# EAGLE board mother_card_02 (EAGLE 8.3.2)
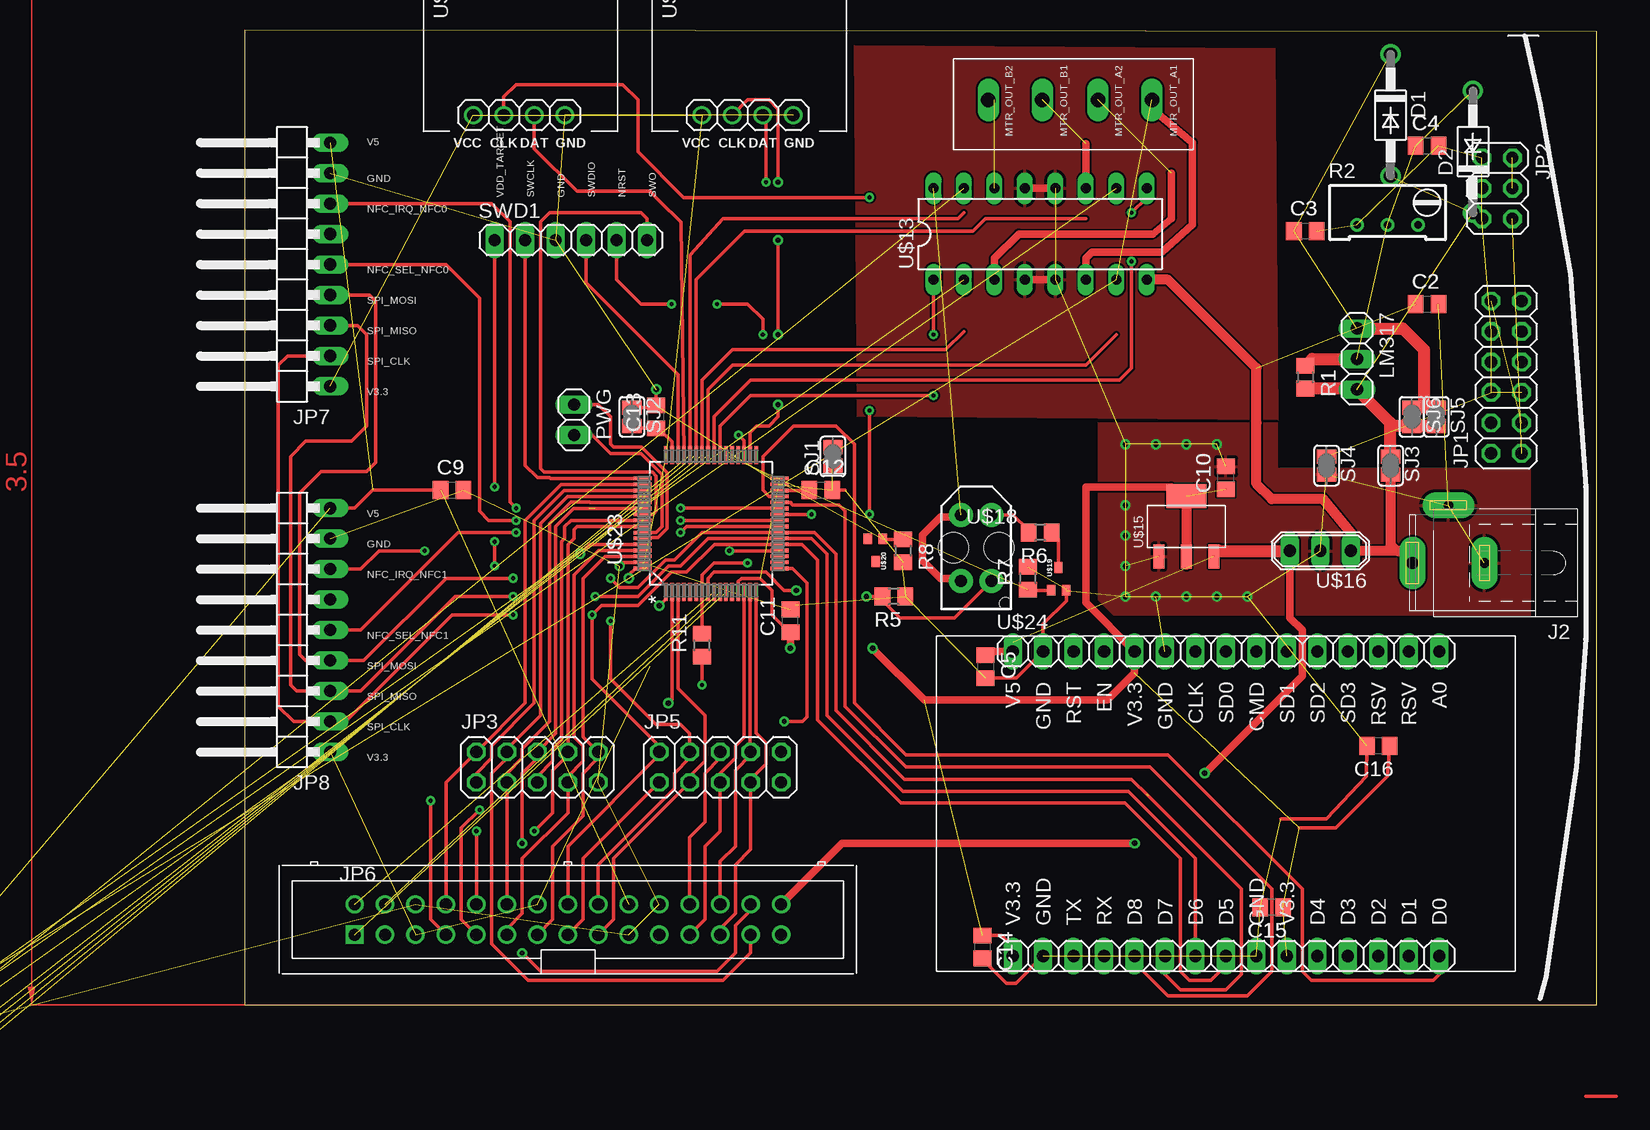
[diagram p0: board, top side]
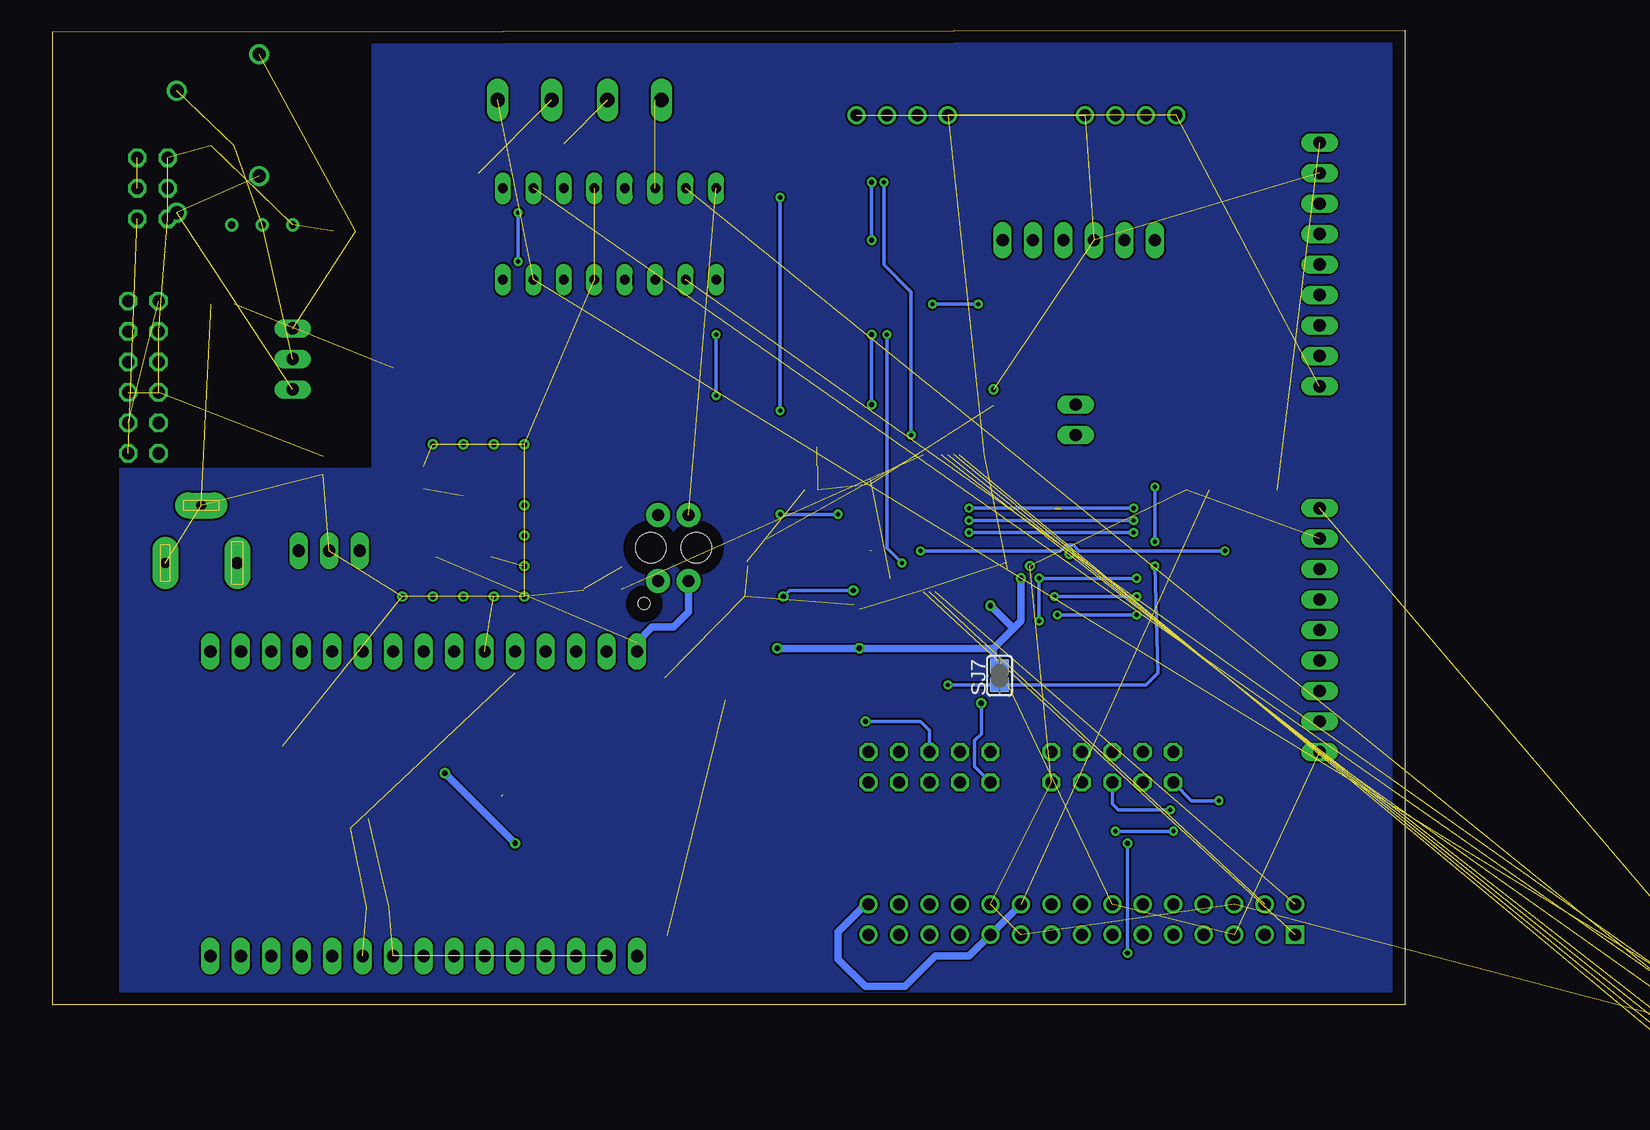
[diagram p1: board, bottom side, seen from below]

Size 112.7 x 81.27 mm. Coordinates in mm from the lower left corner, seen from the top.
Outline: 0,0 112.7,0 112.7,81.14 0,81.27 0,0
Copper layers (1*16): Top 0.035mm / dielectric 1.5mm / Bottom 0.035mm
Design rules "default": minimum track width 6mil, minimum drill 0.35mm, track to track 6mil, track to pad 6mil, pad to pad 6mil, via to via 6mil, smd to smd 6mil, copper to edge 40mil, drill to drill 6mil, minimum pad ring 10mil, minimum via ring 8mil, stop-mask expansion 4mil, vias tented up to drill 0mil, thermal gap 10mil

## Footprints (pad centres in the part's own frame; a part is rotated, then mirrored left to right if it is on the bottom)
C0805 = smd 1.3 x 1.5: 1 -0.95,0; 2 0.95,0
DO41-10 = drill 1.118: A 5.08,0; C -5.08,0
SPC4077 = drill 0.8 pad 2.184 long: 1 -3,0; 2 0,-4.8 | drill 1 pad 2.184 long: 3 3,0
2X06 = drill 1.016 octagon: 1 -6.35,-1.27; 2 -6.35,1.27; 3 -3.81,-1.27; 4 -3.81,1.27; 5 -1.27,-1.27; 6 -1.27,1.27; 7 1.27,-1.27; 8 1.27,1.27; 9 3.81,-1.27; 10 3.81,1.27; 11 6.35,-1.27; 12 6.35,1.27
2X03 = drill 1.016 octagon: 1 -2.54,-1.27; 2 -2.54,1.27; 3 0,-1.27; 4 0,1.27; 5 2.54,-1.27; 6 2.54,1.27
2X05 = drill 1.016 octagon: 1 -5.08,-1.27; 2 -5.08,1.27; 3 -2.54,-1.27; 4 -2.54,1.27; 5 0,-1.27; 6 0,1.27; 7 2.54,-1.27; 8 2.54,1.27; 9 5.08,-1.27; 10 5.08,1.27
2X15/SOCK = drill 1.016 square: 1 -17.78,-1.27 | drill 1.016: 2 -17.78,1.27; 3 -15.24,-1.27; 4 -15.24,1.27; 5 -12.7,-1.27; 6 -12.7,1.27; 7 -10.16,-1.27; 8 -10.16,1.27; 9 -7.62,-1.27; 10 -7.62,1.27; 11 -5.08,-1.27; 12 -5.08,1.27; 13 -2.54,-1.27; 14 -2.54,1.27; 15 0,-1.27; 16 0,1.27; 17 2.54,-1.27; 18 2.54,1.27; 19 5.08,-1.27; 20 5.08,1.27; 21 7.62,-1.27; 22 7.62,1.27; 23 10.16,-1.27; 24 10.16,1.27; 25 12.7,-1.27; 26 12.7,1.27; 27 15.24,-1.27; 28 15.24,1.27; 29 17.78,-1.27; 30 17.78,1.27
1X09/90 = drill 1.016 long: 1 -10.16,-3.81; 2 -7.62,-3.81; 3 -5.08,-3.81; 4 -2.54,-3.81; 5 0,-3.81; 6 2.54,-3.81; 7 5.08,-3.81; 8 7.62,-3.81; 9 10.16,-3.81
1X03 = drill 1.016 long: 1 -2.54,0; 2 0,0; 3 2.54,0
1X02 = drill 1.016 long: 1 -1.27,0; 2 1.27,0
R0805 = smd 1.3 x 1.5: 1 -0.95,0; 2 0.95,0
RTRIM64W = drill 0.61: 1 1.27,-2.54; 2 1.27,0; 3 1.27,2.54
SJ = smd 1.168 x 1.6: 1 -0.762,0; 2 0.762,0
1X06 = drill 1.016 long: 1 -6.35,0; 2 -3.81,0; 3 -1.27,0; 4 1.27,0; 5 3.81,0; 6 6.35,0
SOT355-1-L = smd 1.372 x 0.305: 1 -2.769,3.575; 2 -2.769,2.925; 3 -2.769,2.275; 4 -2.769,1.625; 5 -2.769,0.975; 6 -2.769,0.325; 7 -2.769,-0.325; 8 -2.769,-0.975; 9 -2.769,-1.625; 10 -2.769,-2.275; 11 -2.769,-2.925; 12 -2.769,-3.575; 13 2.769,-3.575; 14 2.769,-2.925; 15 2.769,-2.275; 16 2.769,-1.625; 17 2.769,-0.975; 18 2.769,-0.325; 19 2.769,0.325; 20 2.769,0.975; 21 2.769,1.625; 22 2.769,2.275; 23 2.769,2.925; 24 2.769,3.575
DIL16 = drill 0.813 long: 1 -8.89,-3.81; 2 -6.35,-3.81; 3 -3.81,-3.81; 4 -1.27,-3.81; 5 1.27,-3.81; 6 3.81,-3.81; 7 6.35,-3.81; 8 8.89,-3.81; 9 8.89,3.81; 10 6.35,3.81; 11 3.81,3.81; 12 1.27,3.81; 13 -1.27,3.81; 14 -3.81,3.81; 15 -6.35,3.81; 16 -8.89,3.81
1X4/BLOCK = drill 1.2 long: P$1 0,0; P$2 4.5,0; P$3 9.15,0; P$4 13.65,0
AP2114H = smd 0.9 x 2: GND -2.3,-2.52; VIN 2.3,-2.52; VOUT 0,-2.52 | smd 3.3 x 2: VOUTB 0,2.53
SIP3 = drill 1.016 long: GND 0,0; VI -2.54,0; VO 2.54,0
TCRT5000 = drill 1 pad 2: A 2.75,1.27; CATH 2.75,-1.27; COLL -2.75,1.27; E -2.75,-1.27 | hole 2.5: 0,1.9; 0,-1.9 | hole 1: -4.65,-2.45
SOT323 = smd 0.7 x 0.9: D 0,0.9; G -0.6,-1; S 0.65,-1
HX711 = drill 1.016: CLK -2.54,1.52; DAT -2.54,4.06; GND -2.54,6.6; VCC -2.54,-1.02
QFP50P1200X1200X160-64N = smd 1.5 x 0.3: 1 -5.715,3.759; 2 -5.715,3.251; 3 -5.715,2.743; 4 -5.715,2.261; 5 -5.715,1.753; 6 -5.715,1.245; 7 -5.715,0.762; 8 -5.715,0.254; 9 -5.715,-0.254; 10 -5.715,-0.762; 11 -5.715,-1.245; 12 -5.715,-1.753; 13 -5.715,-2.261; 14 -5.715,-2.743; 15 -5.715,-3.251; 16 -5.715,-3.759; 33 5.715,-3.759; 34 5.715,-3.251; 35 5.715,-2.743; 36 5.715,-2.261; 37 5.715,-1.753; 38 5.715,-1.245; 39 5.715,-0.762; 40 5.715,-0.254; 41 5.715,0.254; 42 5.715,0.762; 43 5.715,1.245; 44 5.715,1.753; 45 5.715,2.261; 46 5.715,2.743; 47 5.715,3.251; 48 5.715,3.759 | smd 0.3 x 1.5: 17 -3.759,-5.715; 18 -3.251,-5.715; 19 -2.743,-5.715; 20 -2.261,-5.715; 21 -1.753,-5.715; 22 -1.245,-5.715; 23 -0.762,-5.715; 24 -0.254,-5.715; 25 0.254,-5.715; 26 0.762,-5.715; 27 1.245,-5.715; 28 1.753,-5.715; 29 2.261,-5.715; 30 2.743,-5.715; 31 3.251,-5.715; 32 3.759,-5.715; 49 3.759,5.715; 50 3.251,5.715; 51 2.743,5.715; 52 2.261,5.715; 53 1.753,5.715; 54 1.245,5.715; 55 0.762,5.715; 56 0.254,5.715; 57 -0.254,5.715; 58 -0.762,5.715; 59 -1.245,5.715; 60 -1.753,5.715; 61 -2.261,5.715; 62 -2.743,5.715; 63 -3.251,5.715; 64 -3.759,5.715
ESP8266 = drill 1.016 long: A0 19.05,0; CLK -1.27,0; CMD 3.81,0; D0 19.05,-25.4; D1 16.51,-25.4; D2 13.97,-25.4; D3 11.43,-25.4; D4 8.89,-25.4; D5 1.27,-25.4; D6 -1.27,-25.4; D7 -3.81,-25.4; D8 -6.35,-25.4; EN -8.89,0; GND -13.97,-25.4; GND@1 3.81,-25.4; GND@2 -3.81,0; GND@3 -13.97,0; RST -11.43,0; RSV 16.51,0; RSV@1 13.97,0; RX -8.89,-25.4; SD0 1.27,0; SD1 6.35,0; SD2 8.89,0; SD3 11.43,0; TX -11.43,-25.4; V3.3 -16.51,-25.4; V3.3@1 6.35,-25.4; V3.3@2 -6.35,0; V5 -16.51,0

## Placement (x,y rotation side)
C2  1u  [C0805]  98.55,58.42 0 top
C3  0.1u  [C0805]  88.39,64.52 0 top
C4  1u  [C0805]  98.55,71.63 0 top
C5  [C0805]  61.72,28.19 270 top
C9  4.7u  [C0805]  17.27,42.93 0 top
C10  4.7u  [C0805]  81.79,43.94 90 top
C11  [C0805]  45.47,32 90 top
C12  [C0805]  48.01,42.93 0 top
C13  [C0805]  34.29,49.02 90 top
C14  [C0805]  61.47,4.83 270 top
C15  [C0805]  85.6,8.13 180 top
C16  [C0805]  94.49,21.59 180 top
D1  1N4004  [DO41-10]  95.5,74.17 270 top
D2  1N4004  [DO41-10]  102.36,71.12 90 top
J2  [SPC4077]  100.33,36.83 180 top
JP1  [2X06]  105.16,52.32 90 top
JP2  [2X03]  104.39,68.07 270 top
JP3  [2X05]  24.38,19.81 0 top
JP5  [2X05]  39.62,19.81 0 top
JP6  [2X15/SOCK]  26.92,7.11 0 top
JP7  [1X09/90]  3.3,61.72 90 top
JP8  [1X09/90]  3.3,31.24 90 top
LM317  [1X03]  92.71,53.85 270 top
PWG  [1X02]  27.43,48.77 270 top
R1  [R0805]  88.39,52.32 270 top
R2  [RTRIM64W]  95.25,66.29 270 top
R5  [R0805]  54.1,34.04 180 top
R6  [R0805]  66.29,39.37 180 top
R7  [R0805]  65.28,35.56 90 top
R8  [R0805]  54.86,37.85 270 top
R11  [R0805]  38.1,29.97 90 top
SJ1  [SJ]  49.02,45.72 90 top
SJ2  [SJ]  32.26,49.02 270 top
SJ3  [SJ]  95.5,44.96 270 top
SJ4  [SJ]  90.17,44.96 270 top
SJ5  [SJ]  99.31,49.02 270 top
SJ6  [SJ]  97.28,49.02 270 top
SJ7  [SJ]  33.78,27.43 90 bottom
SWD1  [1X06]  27.18,63.75 0 top
U1  74LVC4245APWSOT355-1-L  [SOT355-1-L]  -25.4,-3.56 0 top  (outside the outline)
U$13  L293  [DIL16]  66.29,64.26 0 top
U$14  TERMINAL_BLOCK  [1X4/BLOCK]  61.98,75.44 0 top
U$15  AP2114H  [AP2114H]  78.49,39.88 0 top
U$16  OKI-78SR-W36  [SIP3]  89.66,37.85 180 top
U$18  TCRT5000  [TCRT5000]  60.96,38.1 90 top
U$19  DMG1012  [SOT323]  67.82,35.56 0 top
U$20  DMG1012  [SOT323]  52.58,37.85 180 top
U$21  HX711  [HX711]  20.07,71.63 270 top
U$22  HX711  [HX711]  39.12,71.63 270 top
U$23  STM32F410RBT6  [QFP50P1200X1200X160-64N]  38.86,40.13 90 top
U$24  ESP8266  [ESP8266]  80.52,29.46 0 top

## Library data of the parts
C2-C5 C9-C16 R1 R5-R8 U$13-U$16 U$18-U$24 = seniorDesign
D1 D2 = diode
J2 = con-jack; OC_FARNELL: unknown; OC_NEWARK: unknown
JP1-JP3 JP5 JP7 JP8 LM317 PWG SWD1 = pinhead
JP6 = csomers
R2 = rcl
R11 = resistor
SJ1-SJ7 = jumper
U1 = seniorDesign; MANUFACTURER_PART_NUMBER: 74LVC4245APW; VENDOR: NXP

## Nets
BOOT: U$23.60
F_A0: JP3.8 JP6.10 U$23.57
F_BUTTON: U$23.33
F_CLK: JP3.3 JP6.12 U$23.53
F_CS_DP: JP5.3 JP6.17 U$23.3
F_NCS1: JP3.5 JP6.9 U$23.56
F_NCS2: JP3.7 JP6.11 U$23.61
F_NRD: JP3.1 JP6.7 U$23.51
F_NRST: JP3.2 JP6.8 U$23.50
F_NWR: JP3.10 JP6.13 U$23.62
F_PWR_LED_B: JP3.4 JP6.27 U$23.52
F_PWR_LED_G: JP5.7 JP6.25 U$23.16
F_PWR_LED_R: JP5.5 JP6.23 U$23.14
F_RCLK: JP5.1 JP6.15 U$23.2
F_ROTA: JP6.2 U$23.9
F_ROTB: JP6.4 U$23.10
F_ROTSW: JP6.1 U$23.11
F_SEL: JP6.3
F_WIFI_LED_B: JP5.6 JP6.24 U$23.17
F_WIFI_LED_G: JP5.8 JP6.26 U$23.15
F_WIFI_LED_R: JP3.6 JP6.28 U$23.54
GND: C2.2 C5.2 C9.2 C10.2 C11.2 C12.2 C13.2 C14.2 C15.2 C16.2 J2.1 J2.2 JP3.9 JP6.6 JP6.19 JP6.22 JP7.8 JP8.8 R5.1 R7.2 R8.2 SJ1.1 SJ1.2 SJ2.1 SJ4.2 SWD1.3 U1.2 U1.11 U1.12 U1.13 U1.22 U$13.4 U$13.5 U$13.12 U$13.13 U$15.GND U$16.GND U$19.S U$21.GND U$22.GND U$23.12 U$23.31 U$23.63 U$24.GND U$24.GND@1 U$24.GND@2 U$24.GND@3
INT: JP1.9
IR_DRAIN1: U$20.D
IR_SENS_ANLG_IN: R5.2 U$18.E U$23.8
IR_SOURCE1: U$20.S
IR_START0: R7.1 U$19.G U$23.38
IR_START1: R8.1 U$20.G U$23.37
MTR_A1: U1.21 U$23.41
MTR_A2: U1.20 U$23.42
MTR_B1: U1.19 U$23.43
MTR_B2: U1.18 U$23.44
MTR_EN1,2: U$13.1 U$23.39
MTR_EN3,4: U$13.9 U$23.40
MTR_IN_A1: U1.3 U$13.7 U$14.P$4
MTR_IN_A2: U1.4 U$13.2
MTR_IN_B1: U1.5 U$13.10
MTR_IN_B2: U1.6 U$13.15
MTR_OUT_A1: U$13.6
MTR_OUT_A2: U$13.3 U$14.P$3
MTR_OUT_B1: U$13.11 U$14.P$2
MTR_OUT_B2: U$13.14 U$14.P$1
N$1: C12.1 U$23.30
N$5: R6.2 U$18.CATH
N$10: R6.1 U$19.D
N$17: JP5.9
N$18: JP5.10
NFC_IRQ_NFC0: JP7.7 U$23.27
NFC_IRQ_NFC1: JP8.7 U$23.20
NFC_SEL_NFC0: JP7.5 U$23.25
NFC_SEL_NFC1: JP8.5 U$23.24
NRST: R11.2 SWD1.5 U$23.7
PRG_RX<: PWG.1 U$23.59
PRG_TX>: PWG.2 U$23.58
SCL: JP1.8
SDA: JP1.7
SPI2_CLK: U$22.CLK U$23.34
SPI2_MISO: U$22.DAT U$23.35
SPI5_CLK: U$21.CLK U$23.26
SPI5_MISO: U$21.DAT U$23.45
SPI_CLK: JP5.2 JP6.16 JP7.2 JP8.2 U$23.21 U$24.D5
SPI_MISO: JP7.3 JP8.3 U$23.22 U$24.D6
SPI_MOSI: JP5.4 JP6.18 JP7.4 JP8.4 U$23.23 U$24.D7
SWCLK: SWD1.2 U$23.49
SWDIO: SWD1.4 U$23.46
SWO: SWD1.6 U$23.55
USB12V: D1.A D2.C LM317.3 R1.2 SJ3.1 SJ5.2 SJ6.2
USBGND: C3.2 C4.2 JP1.5 JP1.6 JP1.10 JP2.1 JP2.3 JP2.5 R2.1 SJ4.1
USBVBUS: C3.1 D1.C LM317.1 SJ5.1 SJ6.1
V3.3: C10.1 C11.1 C14.1 C15.1 C16.1 JP6.5 JP6.14 JP7.1 JP8.1 SJ7.2 U1.23 U1.24 U$15.VOUT U$15.VOUTB U$21.VCC U$22.VCC U$23.1 U$23.13 U$23.32 U$23.48 U$23.64 U$24.V3.3 U$24.V3.3@1 U$24.V3.3@2
V5: C5.1 C9.1 JP6.20 JP6.21 JP6.30 JP7.9 JP8.9 U1.1 U$13.16 U$15.VIN U$16.VO U$18.A U$18.COLL U$24.V5
V12: C2.1 J2.3 SJ3.2 U$13.8 U$16.VI
V_PULLUP: JP1.2
VADJ: C4.1 D2.A LM317.2 R1.1 R2.2
VBUS: JP2.2 JP2.4
VBUS_A: JP1.4
VCAP_2: C13.1 SJ2.2 U$23.47
VCONN: JP1.1 JP2.6
VDD: JP1.3 JP1.12
VDD_TARGET: R11.1 SJ7.1 SWD1.1
VPU: JP1.11
WIFI_CS: U$23.28 U$24.D8
WIFI_GPIO: U$24.D1
WIFI_IRQ: U$23.29 U$24.D0

## Tracks (layer width: path | path; a pad name or v marks a point on that pad's centre or on a via)
BOOT  (via drill 0.45)
  Top 0.305: U$23.60 28.73,38.38 v27.94,37.59
F_A0  (via drill 0.35)
  Top 0.305: v24.13,14.48 25.65,16 25.65,19.56 26.92,20.83 JP3.8 26.92,38.35 27.43,38.86 27.43,39.62 27.69,39.88 U$23.57 | v19.3,14.48 JP6.10
  Bottom 0.305: v24.13,14.48 v19.3,14.48
F_CLK
  Top 0.305: U$23.53 28.76,41.89 28.73,41.91 27.18,41.91 25.4,40.13 25.4,23.62 23.11,21.34 23.11,20.57 21.84,19.3 JP3.3 JP6.12
F_CS_DP
  Top 0.305: JP6.17 30.73,7.11 30.73,12.19 JP5.3 37.08,19.05 38.35,20.32 38.35,24.13 36.12,26.36 U$23.3
F_NCS1  (via drill 0.35)
  Top 0.305: JP6.9 18.03,7.11 18.03,14.73 v19.56,16.26 | U$23.56 27.18,40.39 26.67,39.88 26.67,38.86 26.42,38.61 26.42,22.1 25.65,21.34 25.65,20.32 24.38,19.05 JP3.5
  Bottom 0.305: JP3.5 24.38,16.76 23.88,16.26 v19.56,16.26
F_NCS2
  Top 0.305: U$23.61 29.49,37.87 27.43,35.81 27.43,22.35 28.19,21.59 28.19,20.32 26.92,19.05 JP3.7 26.92,16 23.11,12.19 23.11,7.62 21.84,6.35 JP6.11
F_NRD  (via drill 0.35)
  Top 0.305: U$23.51 26.62,42.88 24.13,40.39 24.13,25.15 20.57,21.59 20.57,20.57 19.3,19.3 JP3.1 | v15.49,17.02 15.49,7.11 JP6.7
  Bottom 0.305: JP3.1 17.78,17.02 v15.49,17.02
F_NRST
  Top 0.305: U$23.50 26.36,43.38 23.37,40.39 23.37,25.65 23.37,25.62 23.37,25.15 JP3.2 16.76,18.54 JP6.8
F_NWR
  Top 0.305: U$23.62 30.02,37.39 28.19,35.56 28.19,22.35 29.34,21.21 | 29.34,21.21 JP3.10 | JP6.13 25.65,7.11 25.65,13.21 28.19,15.75 28.19,19.3 29.34,20.45 29.34,21.21
F_PWR_LED_B
  Top 0.305: JP6.27 42.16,4.32 39.88,2.03 23.62,2.03 20.57,5.08 20.57,19.3 21.84,20.57 JP3.4 21.84,21.34 24.64,24.13 24.64,40.13 26.9,42.39 U$23.52
F_PWR_LED_G
  Top 0.305: JP6.25 39.62,6.35 40.89,7.62 40.89,11.68 42.16,12.95 JP5.7 42.16,18.8 43.43,20.07 43.43,21.84 42.62,22.66 U$23.16
F_PWR_LED_R
  Top 0.305: U$23.14 41.61,22.3 40.89,21.59 40.89,20.57 39.62,19.3 JP5.5 39.62,14.48 38.35,13.21 38.35,7.11 JP6.23
F_RCLK  (via drill 0.45)
  Top 0.305: JP6.15 28.19,7.11 28.19,12.19 JP5.1 | v35.31,25.15 35.61,25.45 U$23.2
  Bottom 0.305: v35.31,25.15 35.31,22.59 35.86,22.03 35.86,19.86 JP5.1
F_ROTA  (1 unrouted)
F_ROTB  (1 unrouted)
F_ROTSW  (1 unrouted)
F_WIFI_LED_B  (via drill 0.4)
  Top 0.305: JP6.24 37.08,13.97 38.35,15.24 38.35,19.3 39.62,20.57 JP5.6 | v44.96,23.62 46.23,23.62 46.48,23.64 46.86,24.02 46.86,35.18 45.67,36.37 U$23.17
  Bottom 0.305: JP5.6 39.62,22.86 40.39,23.62 v44.96,23.62
F_WIFI_LED_G
  Top 0.305: JP6.26 39.62,11.94 40.89,13.21 40.89,19.56 42.16,20.83 JP5.8 42.11,21.13 U$23.15
F_WIFI_LED_R  (via drill 0.4)  (1 unrouted)
  Top 0.305: 28.68,41.38 U$23.54 | JP6.28 42.16,7.87 40.89,6.6 40.89,4.32 39.37,2.79 24.64,2.79 v23.11,4.32 | 29.21,41.38 27.41,41.38 25.91,39.88 25.91,22.61 JP3.6 24.38,20.57 23.11,19.3 v23.11,13.46
  Bottom 0.305: v23.11,4.32 v23.11,13.46
GND  (via drill 0.45)  (52 unrouted)
  Top 0.305: 68.47,34.69 U$19.S 68.47,33.67 66.55,31.75 U$24.GND@3 64.33,27.24 C5.2 | 48.96,44.89 SJ1.1 | 50.04,42.93 C12.2 | C14.2 61.47,3.81 63.5,1.78 64.26,1.78 U$24.GND | 45.91,33.34 C11.2 | SJ2.1 34.1,49.78 C13.2 v34.29,51.31 | 86.36,15.49 90.17,15.49 93.47,19.05 C16.2 | U$23.63 31.55,36.88 v31.24,36.58 | 55.05,36.71 R8.2
  Top 0.406: R8.2 54.8,36.58
  Top 0.61: U$13.4 U$13.5 | U$13.13 U$13.12
  other vias: 81.03,46.74 78.49,46.74 75.95,46.74 73.41,46.74 73.41,41.66 73.41,39.12 73.41,36.58 73.41,34.04 75.95,34.04 78.49,34.04 81.03,34.04 83.57,34.04
  pour Top: 71.12,48.51 71.12,33.78 72.39,32.51 107.19,32.51 107.19,44.7 86.11,44.7 86.11,48.51
  pour Top: 50.8,80.01 85.85,79.76 86.11,48.77 51.05,49.02
IR_SENS_ANLG_IN  (via drill 0.45)
  Top 0.305: U$18.E 59.14,32.26 54.61,32.26 53.15,33.72 R5.2 v51.82,34.04 | U$23.8 38.61,35.56 39.12,36.07 43.43,36.07 44.96,34.54 v45.97,34.54
  Bottom 0.305: v45.97,34.54 51.31,34.54 v51.82,34.04
IR_START0  (1 unrouted)
  Top 0.305: U$19.G 65.33,34.56 R7.1
IR_START1  (1 unrouted)
  Top 0.305: R8.1 53.23,38.8 U$20.G
  Top 0.406: 55.07,38.85 R8.1
MTR_A1  (1 unrouted)
  Top 0.305: 72.64,55.88 70.1,53.34 40.64,53.34 38.61,51.31 U$23.41
MTR_A2  (1 unrouted)
  Top 0.305: U$23.42 38.1,52.07 40.64,54.61 58.42,54.61 59.94,56.13
MTR_B1  (1 unrouted)
  Top 0.305: U$23.43 37.59,45.87 37.59,60.45 41.66,64.52 60.71,64.52 61.72,65.53 70.1,65.53
MTR_B2  (1 unrouted)
  Top 0.305: 59.94,66.04 59.44,65.53 39.88,65.53 37.11,62.51 U$23.44
MTR_EN1,2  (via drill 0.35)
  Top 0.305: U$23.39 39.62,48.26 42.16,50.8 v57.4,50.8 | U$13.1 v57.4,55.88
  Bottom 0.305: v57.4,55.88 v57.4,50.8
MTR_EN3,4  (via drill 0.35)
  Top 0.305: U$23.40 39.12,49.02 42.16,52.07 72.9,52.07 73.91,53.09 v73.91,61.98 | v73.91,66.04 75.18,67.31 U$13.9
  Bottom 0.305: v73.91,61.98 v73.91,66.04
MTR_IN_A1  (2 unrouted)
MTR_IN_A2  (1 unrouted)
MTR_IN_B1  (1 unrouted)
MTR_IN_B2  (1 unrouted)
MTR_OUT_A1
  Top 0.61: U$13.6 70.1,62.23 70.61,62.74 76.45,62.74 78.99,65.02 78.99,71.88 75.88,74.49
MTR_OUT_A2  (1 unrouted)
  Top 0.305: 62.48,60.96 U$13.3
  Top 0.61: U$13.3 62.48,62.23 64.52,64.26 75.69,64.26 77.22,65.53 77.22,69.35
MTR_OUT_B1  (1 unrouted)
  Top 0.61: 70.1,71.81 U$13.11
MTR_OUT_B2  (1 unrouted)
  Top 0.61: 62.48,75.44 U$14.P$1
N$1
  Top 0.305: U$23.30 47,42.88 C12.1
N$2
  pour Bottom: 0.51,80.77 86.11,80.77 86.11,44.7 107.19,44.7 107.19,0.51 1.02,0.51 0.51,0
N$3
  Top 0.305: 111.76,-7.62 114.3,-7.62
N$5
  Top 0.305: U$18.CATH 64.04,40.85 65.28,39.61 65.28,39.3 R6.2
N$10
  Top 0.305: U$19.D 67.82,38.8 R6.1
NFC_IRQ_NFC0  (via drill 0.35)
  Top 0.305: v36.32,41.4 44.55,41.4 U$23.27 | v22.61,41.4 22.1,41.91 22.1,65.28 20.57,66.8 JP7.7
  Bottom 0.305: v22.61,41.4 v36.32,41.4
NFC_IRQ_NFC1  (via drill 0.35)  (1 unrouted)
  Top 0.305: JP8.7 9.65,36.32 11.18,37.85 v14.99,37.85 | v40.39,37.85 44.45,37.85
  Bottom 0.305: v14.99,37.85 27.16,37.85 27.64,38.33 28.24,38.33 28.72,37.85 v40.39,37.85
NFC_SEL_NFC0  (via drill 0.35)
  Top 0.305: JP7.5 16.76,61.72 19.56,58.93 19.56,41.15 20.32,40.39 v22.61,40.39 | v36.32,40.39 U$23.25
  Bottom 0.305: v36.32,40.39 v22.61,40.39
NFC_SEL_NFC1  (via drill 0.35)
  Top 0.305: U$23.24 36.83,39.88 v36.32,39.37 | v22.61,39.37 17.78,39.37 9.65,31.24 JP8.5
  Bottom 0.305: v36.32,39.37 v22.61,39.37
NRST  (via drill 0.35)
  Top 0.305: R11.2 U$23.7 38.1,35.81 39.12,36.83 v41.91,36.83 | SWD1.5 30.99,60.45 33.02,58.42 v35.56,58.42 | v39.37,58.42 41.91,58.42 43.18,57.15 v43.18,55.88
  Bottom 0.305: v35.56,58.42 v39.37,58.42 | v43.18,55.88 43.18,38.1 v41.91,36.83
PRG_RX<
  Top 0.254: 33.2,38.94 U$23.59 | 33.43,46.13 33.27,46.3
  Top 0.305: 33.2,38.94 34.44,38.94 35.2,39.71 35.2,44.36 33.43,46.13 33.09,46.48 30.73,46.48 30.48,46.74 30.48,49.02 29.46,50.04 PWG.1
PRG_TX>
  Top 0.305: U$23.58 34.29,39.37 34.8,39.88 34.8,44.2 33.02,45.97 30.48,45.97 28.96,47.5 PWG.2
SPI2_CLK  (via drill 0.4)
  Top 0.305: U$23.34 42.11,47.7 42.67,48.26 43.69,48.26 44.45,49.02 v44.45,50.04 | v44.45,55.88 v44.45,63.75 | v44.45,68.58 44.45,74.68 43.69,75.44 41.91,75.44 U$22.CLK
  Bottom 0.305: v44.45,50.04 v44.45,55.88 | v44.45,63.75 v44.45,68.58
SPI2_MISO  (via drill 0.35)
  Top 0.305: U$23.35 41.61,47.04 v41.15,47.5 | U$22.DAT 43.43,73.92 v43.43,68.58
  Bottom 0.305: v41.15,47.5 41.15,59.44 43.43,61.72 v43.43,68.58
SPI5_CLK  (via drill 0.35)
  Top 0.305: U$21.CLK 21.59,75.69 22.61,76.71 31.5,76.71 32.77,75.44 32.77,71.12 36.58,67.31 v52.07,67.31 | v52.07,49.53 v52.07,40.89 | v47.24,40.89 U$23.26
  Bottom 0.305: v52.07,67.31 v52.07,49.53 | v52.07,40.89 v47.24,40.89
SPI5_MISO
  Top 0.305: U$23.45 36.35,65.25 34.54,67.06 33.78,67.82 27.69,67.82 24.13,71.38 U$21.DAT
SPI_CLK  (via drill 0.35)
  Top 0.305: v22.35,32.51 17.27,32.51 8.38,23.62 JP8.2 4.06,23.62 2.79,24.89 2.79,53.34 3.56,54.1 JP7.2 | JP6.16 26.92,13.21 34.54,20.83 JP5.2 34.54,21.59 28.96,27.18 v28.96,32.51 29.72,33.27 32.77,33.27 35.56,36.07 36.83,36.07 39.14,38.38 U$23.21 46.46,38.38 47.75,37.08 47.75,23.74 54.67,16.82 73.36,16.82 77.98,12.19 77.98,2.79 78.74,2.03 80.52,2.03 81.79,3.3 U$24.D5
  Bottom 0.305: v22.35,32.51 v28.96,32.51
SPI_MISO  (via drill 0.35)
  Top 0.305: U$24.D6 79.25,12.19 73.66,17.78 54.86,17.78 48.51,24.13 48.51,37.59 47.24,38.86 44.6,38.86 U$23.22 41.29,38.86 38.61,38.86 36.32,36.58 35.31,36.58 32.77,34.04 v29.21,34.04 | v22.35,34.04 17.53,34.04 9.65,26.16 JP8.3 4.32,26.16 3.81,26.67 3.81,45.72 5.08,46.99 8.89,46.99 10.16,48.26 10.16,55.88 9.4,56.64 JP7.3
  Bottom 0.305: v22.35,34.04 v29.21,34.04
SPI_MOSI  (via drill 0.35)  (1 unrouted)
  Top 0.305: JP6.18 29.46,11.68 35.81,18.03 35.81,19.3 37.08,20.57 JP5.4 37.08,22.61 36.32,23.37 34.29,23.37 30.48,27.18 v30.48,32 | v22.35,35.56 16.76,35.56 9.91,28.7 JP8.4 5.08,28.7 4.57,29.21 4.57,42.67 6.35,44.45 10.16,44.45 10.92,45.21 10.92,58.67 10.41,59.18 JP7.4 | U$24.D7 76.71,2.54 77.98,1.27 81.79,1.27 83.06,2.54 83.06,9.65 75.18,17.53 | 75.31,17.4 73.91,18.8 55,18.8 49.28,24.52 49.28,37.59 47.5,39.37 U$23.23 38.1,39.37 35.81,37.08 35.05,37.08 32.77,34.8 31.24,34.8 v30.48,35.56
  Bottom 0.305: v22.35,35.56 v30.48,35.56 v30.48,32
SWCLK
  Top 0.305: SWD1.2 23.37,44.96 24.38,43.94 25.41,43.94 25.47,43.89 U$23.49
SWDIO
  Top 0.305: U$23.46 36.12,52.53 28.45,60.2 SWD1.4
SWO
  Top 0.305: SWD1.6 33.53,65.53 33.02,66.04 25.4,66.04 24.64,65.28 24.64,44.7 24.94,44.4 33.97,44.4 34.29,44.08 34.29,41.15 34.04,40.89 U$23.55
USB12V  (2 unrouted)
  Top 1.016: SJ5.2 SJ6.2 95.5,48.26 | SJ3.1 95.5,48.26 | 95.5,48.26 95.5,48.51 LM317.3 92.64,51.37 R1.2
USBGND  (9 unrouted)
USBVBUS  (2 unrouted)
  Top 1.016: 98.55,49.78 SJ5.1 | 98.55,49.78 SJ6.1 | LM317.1 96.52,56.39 98.3,54.61 98.3,50.04 98.55,49.78
V3.3  (via drill 0.45)  (15 unrouted)
  Top 0.305: U$23.13 41.12,35.28 41.4,35.56 42.93,35.56 43.94,34.54 43.94,32.51 45.4,31.05 C11.1 | C14.1 63.06,5.78 64.01,4.83 U$24.V3.3 | C16.1 95.25,19.05 90.93,14.73 87.88,14.73 | U$23.64 32.56,36.37 32,35.81 v32,35.56 | U$23.1 35.1,33.83 v34.54,33.27
  Top 0.61: U$15.VOUT 78.49,36.58 | 74.17,29.97 U$24.V3.3@2 | U$24.V3.3@2 70.1,33.53 70.1,43.18 77.22,43.18 78.49,41.91 | U$24.V3.3@2 74.17,27.69 71.88,25.4 56.64,25.4 v52.32,29.72 | v45.47,29.72 C11.1
  Top 0.813: U$15.VOUTB 78.49,41.91 U$15.VOUT
  Bottom 0.61: v52.32,29.72 v45.47,29.72 34.29,29.72 | v32,35.56 32,32 32.64,31.37 | 32.64,31.37 34.29,29.72 | v34.54,33.27 32.64,31.37 | 34.29,29.72 34.29,28.7 SJ7.2
V5  (via drill 0.45)  (5 unrouted)
  Top 0.305: JP8.9 9.14,41.4 10.67,42.93 C9.1
  Top 0.61: 81.27,37.85 U$15.VIN | U$18.A 59.51,40.67 58,40.67 56.49,39.17 56.49,37.03 58,35.53 59.51,35.53 U$18.COLL | U$24.V5 62.04,29.46 C5.1 | v80.01,19.3 88.14,27.43 88.14,31.24 87.12,32.26 U$16.VO | v74.17,13.46 49.78,13.46 JP6.30
  Top 1.016: 81.27,37.85 U$16.VO
  Bottom 0.61: U$24.V5 64.01,30.23 62.74,31.5 60.96,31.5 59.69,32.77 U$18.COLL | v80.01,19.3 v74.17,13.46 | JP6.30 44.96,8.38 47.24,6.1 47.24,3.81 44.96,1.52 41.66,1.52 39.12,4.06 36.32,4.06 JP6.21 JP6.20
V12  (1 unrouted)
  Top 0.305: 84.07,48.51 84.33,48.51
  Top 0.813: 96.01,37.85 U$16.VI 92.2,39.37 89.92,42.16 85.6,42.16 84.33,43.43 84.33,48.51 84.33,53.09 76.96,60.45 U$13.8 | 96.01,37.85 96.31,37.85 J2.3 | SJ3.2 95.5,38.35 96.01,37.85
VADJ  (3 unrouted)
  Top 1.016: R1.1 88.97,53.85 LM317.2
VBUS  (1 unrouted)
VCAP_2
  Top 0.305: U$23.47 35.61,46.94 34.8,47.75 34.61,47.75 C13.1 32.45,48.07 SJ2.2
VCONN  (1 unrouted)
VDD  (1 unrouted)
VDD_TARGET  (via drill 0.35)
  Top 0.305: R11.1 v38.1,26.67 | SWD1.1 v20.83,43.18 | v20.83,38.61 v20.83,36.58
  Bottom 0.305: v20.83,43.18 v20.83,38.61 | v20.83,36.58 20.57,27.69 21.59,26.67 SJ7.1 v38.1,26.67
WIFI_CS
  Top 0.305: U$23.28 44.6,41.86 45.47,41.86 | 45.47,41.86 45.52,41.86 | 45.47,41.86 45.67,41.66 49.53,41.66 50.04,41.15 50.04,24.89 55.12,19.81 75.44,19.81 85.6,9.65 85.6,2.79 83.57,0.76 76.96,0.76 74.17,3.56 U$24.D8 74.17,3.81
WIFI_IRQ
  Top 0.305: 44.55,42.42 U$23.29 43.71,42.39 43.18,42.93 43.18,45.72 45.72,48.26 49.28,48.26 50.8,46.74 50.8,25.15 55.12,20.83 76.96,20.83 88.14,9.65 88.14,2.79 88.9,2.03 99.06,2.03 99.57,2.54 U$24.D0
(copper drawn outside any net)
  shapes: Top area x2

## Text on the board
tPlace: MTR_OUT_B2 | MTR_OUT_B1 | MTR_OUT_A2 | MTR_OUT_A1 | V5 | GND | VDD_TARGET | SWCLK | GND | SWDIO | NRST | SWO | NFC_IRQ_NFC0 | NFC_SEL_NFC0 | SPI_MOSI | SPI_MISO | SPI_CLK | V3.3 | V5 | GND | NFC_IRQ_NFC1 | NFC_SEL_NFC1 | SPI_MOSI | SPI_MISO | SPI_CLK | V3.3